# EAGLE board comm-board (EAGLE 8.1.0)
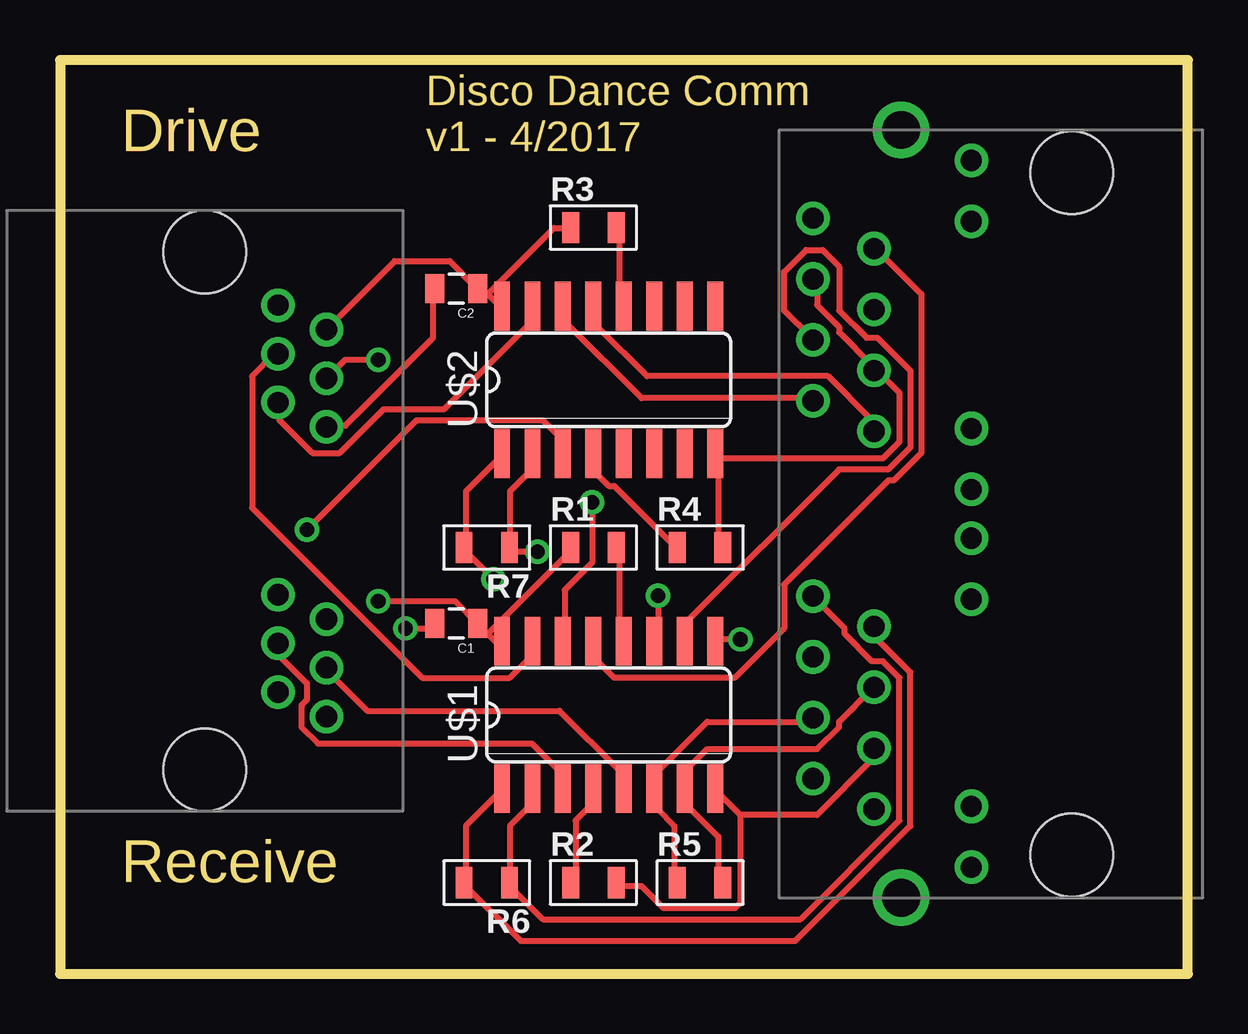
[diagram p0: board, top side]
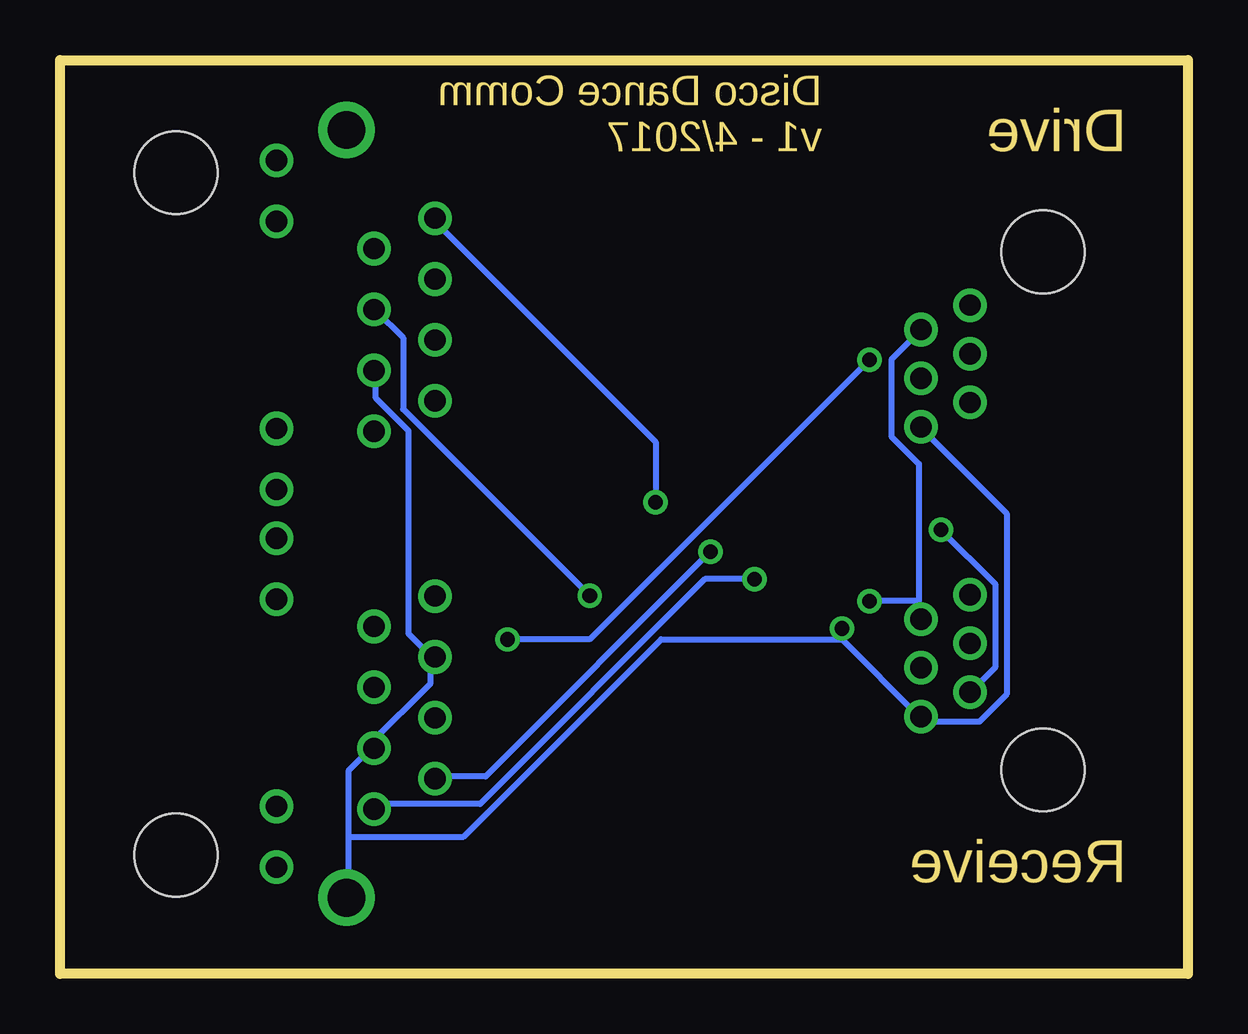
[diagram p1: board, bottom side, seen from below]

Size 46.99 x 38.1 mm. Coordinates in mm from the lower left corner, seen from the top.
Outline: 0,0 46.99,0 46.99,38.1 0,38.1 0,0
Copper layers (1*16): Top 0.035mm / dielectric 1.5mm / Bottom 0.035mm
Design rules "default": minimum track width 10mil, minimum drill 24mil, track to track 8mil, track to pad 8mil, pad to pad 8mil, via to via 8mil, smd to smd 8mil, copper to edge 40mil, drill to drill 8mil, minimum pad ring 10mil, minimum via ring 8mil, stop-mask expansion 4mil, vias tented up to drill 0mil, thermal gap 10mil

## Footprints (pad centres in the part's own frame; a part is rotated, then mirrored left to right if it is on the bottom)
0805 = smd 0.8 x 1.2: 1 -0.9,0; 2 0.9,0
R0805 = smd 0.7 x 1.3: P$1 -0.95,0; P$2 0.95,0
SOP-16 = smd 0.66 x 2.032: 1 -4.445,-3.073; 2 -3.175,-3.073; 3 -1.905,-3.073; 4 -0.635,-3.073; 5 0.635,-3.073; 6 1.905,-3.073; 7 3.175,-3.073; 8 4.445,-3.073; 9 4.445,3.073; 10 3.175,3.073; 11 1.905,3.073; 12 0.635,3.073; 13 -0.635,3.073; 14 -1.905,3.073; 15 -3.175,3.073; 16 -4.445,3.073
RJE01-660-02 = drill 0.89: 1@1 7.3,5.08; 1@2 19.37,5.08; 2@1 6.28,3.05; 2@2 18.35,3.05; 3@1 5.27,5.08; 3@2 17.34,5.08; 4@1 4.25,3.05; 4@2 16.32,3.05; 5@1 3.24,5.08; 5@2 15.31,5.08; 6@1 2.22,3.05; 6@2 14.29,3.05 | hole 3.45: 0,0; 21.59,0
RJSBE-5380-C2 = drill 0.89: 1@1 1.91,8.25; 1@2 17.66,8.25; 2@1 3.18,10.79; 2@2 18.93,10.79; 3@1 4.45,8.25; 3@2 20.2,8.25; 4@1 5.72,10.79; 4@2 21.47,10.79; 5@1 6.99,8.25; 5@2 22.74,8.25; 6@1 8.26,10.79; 6@2 24.01,10.79; 7@1 9.53,8.25; 7@2 25.28,8.25; 8@1 10.8,10.79; 8@2 26.55,10.79; 9@1 13.21,4.19; 9@2 28.96,4.19; 10@1 10.67,4.19; 10@2 26.42,4.19; 11@1 2.03,4.19; 11@2 17.78,4.19; 12@1 -0.51,4.19; 12@2 15.24,4.19 | drill 1.57: SHIELD@1 -1.78,7.11; SHIELD@2 30.23,7.11 | hole 3.45: 0,0; 28.45,0

## Placement (x,y rotation side)
C1  .1u  [0805]  16.51,14.61 180 top
C2  .1u  [0805]  16.51,28.57 180 top
R1  1k  [R0805]  22.23,17.78 0 top
R2  1k  [R0805]  22.23,3.81 0 top
R3  1k  [R0805]  22.23,31.11 0 top
R4  1k  [R0805]  26.67,17.78 0 top
R5  100  [R0805]  26.67,3.81 0 top
R6  100  [R0805]  17.78,3.81 180 top
R7  100  [R0805]  17.78,17.78 180 top
U$1  SN65C1167  [SOP-16]  22.86,10.79 0 top
U$2  SN65C1167  [SOP-16]  22.86,24.77 0 top
U$3  RJE01-660-02  [RJE01-660-02]  6.03,30.1 270 top
U$4  RJSBE-5380-C2  [RJSBE-5380-C2]  42.16,4.96 90 top

## Library data of the parts
C1 C2 = SparkFun
R1-R7 = MF_Passives; POPULATE: 1
U$1-U$4 = GARTH

## Nets
D1: U$1.15 U$3.4@1
D2: U$1.9 U$3.3@1
D3: U$2.15 U$3.2@1
D4: U$2.9
D-B-1: U$1.10 U$4.4@2
D-B-2: U$1.11 U$4.5@2
D-BR-1: U$1.14 U$4.8@2
D-BR-2: U$1.13 U$4.7@2
D-O-1: U$2.14 U$4.2@2
D-O-2: U$2.13 U$4.1@2
GND: C1.2 C2.2 R2.P$2 R4.P$2 U$1.8 U$2.8 U$3.1@1 U$3.1@2 U$4.3@1 U$4.3@2 U$4.6@1 U$4.6@2 U$4.SHIELD@1
N$1: R1.P$2 U$1.12
N$3: R2.P$1 U$1.4
N$5: R3.P$2 U$2.12
N$6: R4.P$1 U$2.4
R1: U$1.3 U$3.4@2
R2: U$1.5 U$3.3@2
R3: U$2.3 U$3.2@2
R4: U$2.5
R-B-1: R5.P$1 U$1.6 U$4.4@1
R-B-2: R5.P$2 U$1.7 U$4.5@1
R-BR-1: R6.P$1 U$1.2 U$4.8@1
R-BR-2: R6.P$2 U$1.1 U$4.7@1
R-O-1: R7.P$1 U$2.2 U$4.2@1
R-O-2: R7.P$2 U$2.1 U$4.1@1
VCC: C1.1 C2.1 R1.P$1 R3.P$1 U$1.16 U$2.16 U$3.5@1 U$3.5@2

## Tracks (layer width: path | path; a pad name or v marks a point on that pad's centre or on a via)
D1
  Top 0.254: U$1.15 19.66,13.72 19.66,13.26 18.75,12.34 15.09,12.34 8,19.43 8,24.92 8.91,25.83 U$3.4@1
D2  (via drill 0.61)
  Top 0.254: v28.35,13.95 27.43,13.95 U$1.9 | v13.26,25.6 11.89,25.6 11.2,24.92 U$3.3@1
  Bottom 0.254: v28.35,13.95 24.92,13.95 v13.26,25.6
D3
  Top 0.254: U$2.15 19.66,27.66 19.66,27.2 16,23.55 13.49,23.55 11.66,21.72 10.52,21.72 9.14,23.09 9.14,23.77 U$3.2@1
D-B-1
  Top 0.254: U$1.10 26.06,13.95 26.06,14.63 32.46,21.03 34.52,21.03 35.43,21.95 35.43,25.15 34.06,26.52 33.6,26.52 32.46,27.66 32.46,29.49 31.77,30.18 31.09,30.18 30.18,29.26 30.18,27.66 31.32,26.52 U$4.4@2
D-B-2  (via drill 0.61)
  Top 0.254: v24.92,15.77 24.92,13.95 U$1.11
  Bottom 0.254: v24.92,15.77 32.69,23.55 32.69,26.52 33.83,27.66 U$4.5@2
D-BR-1  (via drill 0.61)
  Top 0.254: v22.17,19.66 22.17,17.14 21.03,16 21.03,13.95 U$1.14
  Bottom 0.254: v22.17,19.66 22.17,22.17 31.32,31.32 U$4.8@2
D-BR-2
  Top 0.254: U$1.13 22.4,13.72 22.4,13.03 23.09,12.34 28.12,12.34 30.18,14.4 30.18,16.23 34.52,20.57 34.75,20.57 35.89,21.72 35.89,28.35 34.06,30.18 U$4.7@2
D-O-1
  Top 0.254: U$2.14 21.03,27.66 21.03,27.2 24.23,24 31.32,24 U$4.2@2
D-O-2
  Top 0.254: U$2.13 22.4,27.66 22.4,26.98 24.46,24.92 32,24.92 33.83,23.09 33.83,22.63 U$4.1@2
GND  (via drill 0.61)
  Top 0.254: v14.4,14.4 15.54,14.4 C1.2 | C2.2 15.54,28.57 15.54,26.52 11.89,22.86 11.2,22.86 U$3.1@1 | 27.43,21.49 27.43,17.83 R4.P$2 | U$4.6@2 31.55,28.8 31.55,27.89 32.46,26.98 32.46,26.75 33.83,25.38 U$4.3@2 34.06,25.15 34.98,24.23 34.98,22.17 34.29,21.49 27.43,21.49 | 27.43,21.49 U$2.8 | 28.35,6.63 28.35,2.97 28.12,2.74 25.15,2.74 24.23,3.66 23.32,3.66 R2.P$2 | 28.35,6.63 27.43,7.54 U$1.8 | 28.35,6.63 31.55,6.63 33.83,8.91 33.83,9.37 U$4.3@1
  Bottom 0.254: 14.4,13.95 11.2,10.74 U$3.1@2 10.97,10.52 8.69,10.52 7.54,11.66 7.54,19.2 10.97,22.63 U$3.1@1 | 34.98,5.71 34.98,8.46 34.06,9.37 U$4.3@1 34.06,9.6 31.55,12.12 31.55,13.03 U$4.6@1 31.55,13.26 32.46,14.17 32.46,22.63 33.83,24 33.83,25.15 U$4.3@2 | 34.98,5.71 34.98,3.2 U$4.SHIELD@1 | 14.4,13.95 21.95,13.95 30.18,5.71 34.98,5.71 | 14.4,13.95 v14.4,14.4
N$1
  Top 0.254: R1.P$2 23.32,17.6 23.32,13.95 U$1.12
N$3
  Top 0.254: R2.P$1 21.49,3.89 21.49,6.4 22.17,7.09 22.17,7.54 U$1.4
N$5
  Top 0.254: R3.P$2 23.32,31.09 23.32,27.89 U$2.12
N$6
  Top 0.254: R4.P$1 25.6,17.83 23.09,20.34 22.86,20.34 22.4,20.8 22.4,21.49 U$2.4
R1
  Top 0.254: U$1.3 20.8,7.77 20.8,8.46 19.66,9.6 10.74,9.6 10.06,10.29 10.06,11.2 10.29,11.43 10.29,12.12 9.14,13.26 9.14,13.72 U$3.4@2
R2
  Top 0.254: U$1.5 23.32,7.77 23.32,8.46 20.8,10.97 12.8,10.97 11.2,12.57 U$3.3@2
R3  (via drill 0.61)
  Top 0.254: v10.29,18.52 14.86,23.09 20.12,23.09 20.8,22.4 20.8,21.72 U$2.3
  Bottom 0.254: v10.29,18.52 8,16.23 8,12.8 8.91,11.89 U$3.2@2
R-B-1
  Top 0.254: R5.P$1 25.6,3.89 25.6,6.17 24.92,6.86 24.92,7.54 U$1.6 24.92,7.77 24.92,8.46 26.98,10.52 31.32,10.52 U$4.4@1
R-B-2
  Top 0.254: R5.P$2 27.43,3.89 27.43,5.71 26.06,7.09 26.06,7.54 U$1.7 26.06,7.77 26.06,8.46 26.98,9.37 31.55,9.37 32.46,10.29 32.46,10.52 33.83,11.89 U$4.5@1
R-BR-1
  Top 0.254: U$1.2 19.66,7.54 19.66,7.09 18.75,6.17 18.75,3.89 R6.P$1 18.75,3.66 20.12,2.29 30.86,2.29 34.98,6.4 34.98,12.34 34.29,13.03 33.83,13.03 32.69,14.17 32.69,14.4 31.55,15.54 U$4.8@1
R-BR-2
  Top 0.254: U$1.1 18.29,7.54 16.92,6.17 16.92,3.89 R6.P$2 16.92,3.66 19.2,1.37 30.63,1.37 35.43,6.17 35.43,12.57 34.06,13.95 34.06,14.4 U$4.7@1
R-O-1  (via drill 0.61)
  Top 0.254: U$2.2 19.66,21.49 19.66,21.03 18.75,20.12 18.75,17.83 R7.P$1 18.75,17.6 v19.89,17.6
  Bottom 0.254: v19.89,17.6 29.26,8.23 31.32,8.23 U$4.2@1
R-O-2  (via drill 0.61)
  Top 0.254: U$2.1 18.29,21.49 16.92,20.12 16.92,17.83 R7.P$2 16.92,17.6 v18.06,16.46
  Bottom 0.254: v18.06,16.46 20.12,16.46 29.49,7.09 33.83,7.09 U$4.1@1
VCC  (via drill 0.61)
  Top 0.254: 17.83,14.17 18.29,13.72 U$1.16 | 17.83,14.17 17.6,14.4 C1.1 17.37,14.63 16.46,15.54 v13.26,15.54 | 17.83,14.17 21.26,17.6 R1.P$1 | 17.83,28.35 18.29,27.89 U$2.16 | 17.83,28.35 17.6,28.57 C2.1 17.37,28.57 16.23,29.72 13.95,29.72 11.2,26.98 U$3.5@1 | 17.83,28.35 20.57,31.09 21.26,31.09 R3.P$1
  Bottom 0.254: 11.2,15.54 11.2,21.26 12.34,22.4 12.34,25.6 11.2,26.75 U$3.5@1 | 11.2,15.54 11.2,14.86 U$3.5@2 | 11.2,15.54 v13.26,15.54

## Text on the board
Dimension: Drive | Disco Dance Comm / v1 - 4/2017 | Receive